# Altium PCB KNX_MCU_24CH_V1.2.PcbDoc (part 2 of 2)
Units mm, origin at the board's own origin, x right, y up, seen from the top; angles counter-clockwise.
Board outline 205.5 x 64.4 mm, 2 copper layers (F.Cu, B.Cu), stack 1.581 mm thick; 138 components, 141 nets, 447 pads, 311 vias.
Unrouted connection lines stored in the file: 65.
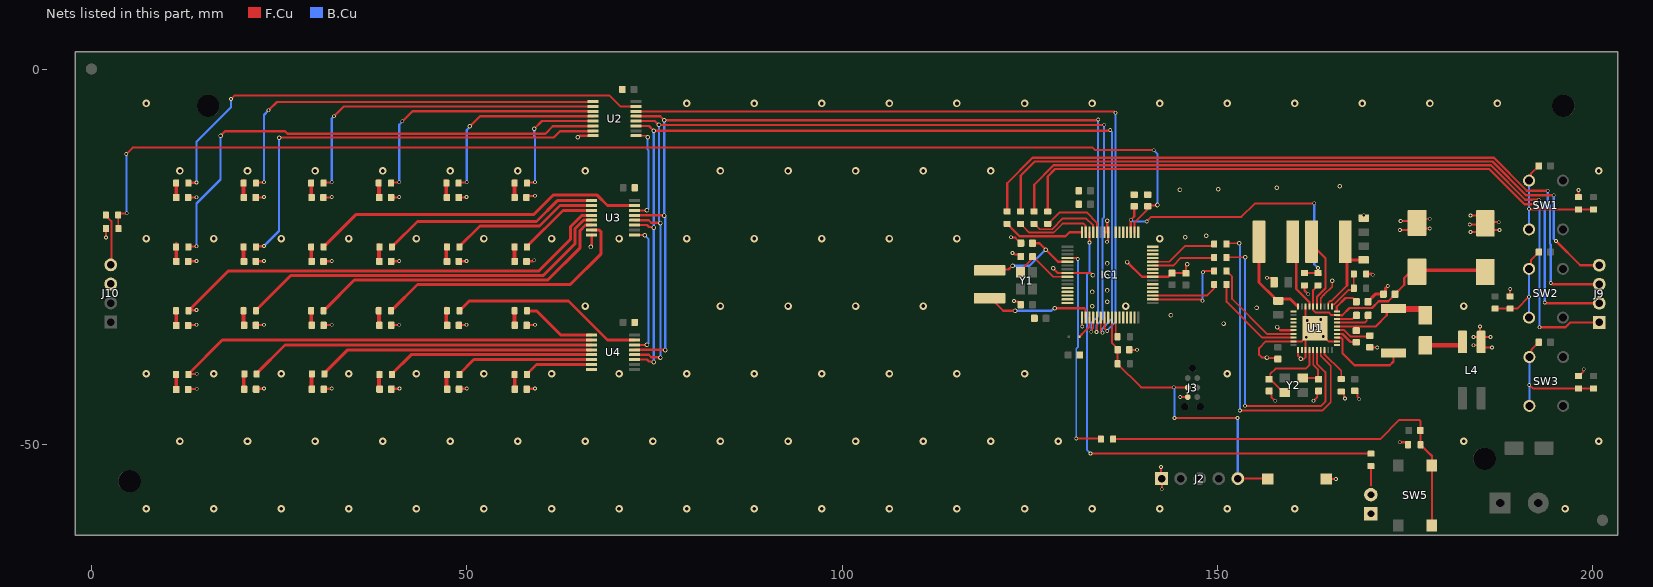
[diagram p2: the nets of this part, all layers, seen from the top]

## Via types
v1: diameter 0.5, hole 0.3, F.Cu to B.Cu, tented both sides, 144 vias
v2: diameter 1, hole 0.5, F.Cu to B.Cu, tented both sides, 98 vias
v3: diameter 0.6, hole 0.35, F.Cu to B.Cu, tented both sides, 69 vias

## Nets (pads, with @x,y where several pads share a name; then routed paths per layer and width w, separated by ;. In a path a pad name is that pad's centre, name@x,y a point inside that pad or via, vN(x,y) a via of type N, cw(c..) or ccw(c..) an arc to the next point about the centre after c; other vN are vias at no path point) (continued)
GND: C1.1 C2.1 C3.1 C4.1 C5.1 C6.1 C7.1 C8.2 C9.2 C12.1 C13.1 C14.1 C15.1 C16.1 C17.1 C18.1 C19.2 C20.2 C21.1 C22.2 C23.1 C24.1 C28.2 C30.2 C31.2 C32.2 D1.1 D4.1 D5.1 D6.1 D7.1 D8.1 D9.1 D10.1 D11.1 D12.1 D13.1 D14.1 D15.1 D16.1 D17.1 D18.1 D19.1 D20.1 D21.1 D22.1 D23.1 D24.1 D25.1 D26.1 D27.1 IC1.8 IC1.17 IC1.40 IC1.57 IC1.58 J2.1 J3.5 J10.3 L4.3 R1.2 R3.1 R6.2 R7.2 R39.2 R40.1 R42.2 R44.2 SW4.2 U1.1 U1.2 U1.14 U1.18 U1.23 U1.24 U1.25 U1.26 U1.29 U1.31 U1.33 U1.41 U2.8 U3.8 U4.8 | length 121.4
  F.Cu w0.25: v1(162.78,-44.2) 163.28,-43.7 163.28,-43.075 C19.2@163.48,-42.875
  F.Cu w0.254: J10.3@1.93,-28.206 2.354,-28.63 J10.3@2.593,-28.63 ; v1(1.93,-22.433) 1.935,-22.427 R44.2@1.935,-21.267 ; v1(122.68,-24.5) 122.747,-24.5 122.974,-24.727 123.52,-24.727 C9.2@123.793,-25 ; v1(122.88,-30.9) 122.927,-30.947 123.365,-30.947 123.47,-31.052 123.482,-31.052 123.818,-31.388 C8.2@123.818,-31.4 ; IC1.17@131.943,-33.089 131.959,-33.105 131.959,-34.284 v1(131.975,-34.3) ; v1(135.28,-23) 135.28,-22.933 135.42,-22.793 135.42,-21.775 IC1.57@135.443,-21.752 ; v1@142.468,-53 v1(142.48,-53.013) J2.1@142.48,-54.013 ; J2.1@142.58,-54.987 v1(142.58,-55.987) v1@142.593,-56 ; v1@145.038,-43.709 v1(145.051,-43.697) J3.5@146.051,-43.697 ; v1(156.58,-27.8) 156.627,-27.847 157.157,-27.847 157.48,-28.17 C15.1@157.48,-28.413 ; C17.1@158.027,-38.627 157.889,-38.488 156.654,-38.488 v3(156.592,-38.427) 156.587,-38.422 155.887,-38.422 155.537,-38.072 155.537,-37.172 156.427,-36.282 U1.29@160.101,-36.282 161.247,-36.282 U1.41@161.747,-35.782 ; U1.31@160.747,-37.427 160.747,-38.209 161.08,-38.542 v3(161.08,-38.6) ; v3@161.08,-38.672 161.437,-38.672 161.747,-38.362 U1.33@161.747,-37.427 U1.41@161.747,-35.782 ; U1.18@161.747,-31.636 161.747,-33.282 v3(161.962,-33.497) v3(162.997,-34.532) ; v3(163.747,-33.372) 163.747,-33.782 v3(162.997,-34.532) ; U1.14@163.747,-31.636 163.747,-30.533 164.18,-30.1 165.28,-29 v3(165.28,-28.2) ; SW4.2@164.768,-54.6 v1(165.767,-54.6) v1@165.78,-54.587 ; U1.2@165.893,-36.282 164.747,-36.282 v3(164.087,-35.622) v3(162.997,-34.532) ; R40.1@166.477,-42.934 166.539,-42.934 166.825,-43.22 166.825,-43.678 166.98,-43.833 v1(166.98,-43.9) ; C18.1@168.28,-42.862 168.292,-42.862 168.628,-43.198 168.628,-43.681 168.88,-43.933 v1(168.88,-44) ; C16.1@169.48,-19.863 v1(169.48,-19.475) ; v1@174.28,-21.462 v1(174.293,-21.45) 175.293,-21.45 ; v1@174.38,-20.262 v1(174.393,-20.25) C22.2@175.393,-20.25 ; C22.2@177.268,-21.25 v1(178.267,-21.25) v1@178.28,-21.237 ; C22.2@177.268,-19.95 v1(178.267,-19.95) v1@178.28,-19.937 ; v1@183.58,-20.713 v1(183.593,-20.7) C28.2@184.593,-20.7 ; v1@183.68,-21.712 v1(183.693,-21.7) C28.2@184.693,-21.7 ; v1@183.68,-19.513 v1(183.693,-19.5) C28.2@184.693,-19.5 ; v1@184.08,-36.812 v1(184.093,-36.8) L4.3@185.093,-36.8 ; v1@184.08,-35.713 v1(184.093,-35.7) L4.3@185.093,-35.7 ; v1@184.968,-34.3 v1(184.98,-34.313) L4.3@184.98,-35.312 ; L4.3@185.368,-35.7 v1(186.367,-35.7) v1@186.38,-35.687 ; L4.3@185.568,-37.1 v1(186.567,-37.1) v1@186.58,-37.087 ; C28.2@186.467,-20.4 v1(187.467,-20.4) v1@187.48,-20.387 ; C28.2@186.551,-21.451 v1(187.551,-21.451) v1@187.564,-21.438 ; v1@188.968,-29.3 v1(188.98,-29.313) R6.2@188.98,-30.312 ; v1@198.068,-16.1 v1(198.08,-16.113) R1.2@198.08,-17.113 ; R7.2@198.08,-40.913 198.142,-40.913 198.733,-40.322 198.733,-40.047 v1(198.78,-40) ; U1.41@161.747,-35.782 v3(161.822,-35.707) v3(162.997,-34.532)
  F.Cu w0.3: D16.1@12.88,-34.112 v1@13.955,-34.112 ; D9.1@12.88,-25.613 v1@13.955,-25.613 ; D1.1@12.88,-17.113 v1@13.955,-17.113 ; D22.1@12.905,-42.613 v1@13.98,-42.613 ; D17.1@21.865,-34.097 v1@22.94,-34.097 ; D10.1@21.865,-25.598 v1@22.94,-25.598 ; D4.1@21.865,-17.097 v1@22.94,-17.097 ; D23.1@21.89,-42.597 v1@22.965,-42.597 ; D18.1@30.89,-34.097 v1@31.965,-34.097 ; D12.1@30.89,-25.598 v1@31.965,-25.598 ; D5.1@30.89,-17.097 v1@31.965,-17.097 ; D24.1@30.915,-42.597 v1@31.99,-42.597 ; D19.1@39.89,-34.097 v1@40.965,-34.097 ; D13.1@39.89,-25.598 v1@40.965,-25.598 ; D6.1@39.89,-17.097 v1@40.965,-17.097 ; D25.1@39.915,-42.597 v1@40.99,-42.597 ; D20.1@48.865,-34.097 v1@49.94,-34.097 ; D14.1@48.865,-25.598 v1@49.94,-25.598 ; D7.1@48.865,-17.097 v1@49.94,-17.097 ; D26.1@48.89,-42.597 v1@49.965,-42.597 ; D21.1@57.965,-34.097 v1@59.04,-34.097 ; D15.1@57.965,-25.598 58.829,-25.598 58.946,-25.481 v1(59,-25.481) ; D8.1@57.965,-17.097 58.137,-16.926 59.04,-16.926 v1(59.078,-16.888) ; D27.1@57.99,-42.597 v1@59.065,-42.597 ; v3(64.8,-9.1) 65.012,-8.888 U2.8@66.838,-8.888 ; v3(66.5,-23.7) 66.638,-23.562 U3.8@66.638,-22.087 ; v3(128.108,-26.557) 128.728,-27.177 IC1.8@130.018,-27.177 133.128,-27.177 v3(133.408,-27.457) ; IC1.58@134.943,-21.752 IC1.57@135.443,-21.752 135.3,-21.752 v3(135.3,-20.2) ; v3(137.958,-25.707) 139.928,-27.677 IC1.40@141.368,-27.677 143.453,-27.677 143.948,-27.182 145.758,-27.182 145.788,-27.212 145.788,-26.177 v3(145.958,-26.007) ; v3(157.937,-34.372) 158.347,-34.782 U1.26@160.101,-34.782 ; R42.2@161.58,-28.825 161.58,-29.5 v1(162.08,-30) ; v1(174.28,-49.7) 175.058,-49.7 175.077,-49.718 175.152,-49.718 175.402,-49.968 R3.1@175.402,-50.043
  F.Cu w0.4: R39.2@169.805,-27.3 170.58,-27.3 v1(170.68,-27.4) ; C14.1@170.055,-31 170.055,-30.975 171.03,-30 172.105,-30 172.355,-29.75 172.355,-29.225 v1(172.68,-28.9)
  other v1: 14.018,-42.574 23.003,-42.559 32.028,-42.559 41.028,-42.559 50.003,-42.559 59.103,-42.559 13.993,-34.074 22.978,-34.059 32.003,-34.059 41.003,-34.059 49.978,-34.059 59.078,-34.059 13.993,-25.574 22.978,-25.559 32.003,-25.559 41.003,-25.559 49.978,-25.559 13.993,-17.074 22.978,-17.059 32.003,-17.059 41.003,-17.059 49.978,-17.059
  other v2: 7.293,-58.576 16.293,-58.576 25.293,-58.576 34.293,-58.576 43.293,-58.576 52.293,-58.576 61.293,-58.576 70.293,-58.576 79.293,-58.576 88.293,-58.576 97.293,-58.576 106.293,-58.576 115.293,-58.576 124.293,-58.576 133.293,-58.576 142.293,-58.576 151.293,-58.576 160.293,-58.576 196.293,-58.576 11.793,-49.576 20.793,-49.576 29.793,-49.576 38.793,-49.576 47.793,-49.576 56.793,-49.576 65.793,-49.576 74.793,-49.576 83.793,-49.576 92.793,-49.576 101.793,-49.576 110.793,-49.576 119.793,-49.576 128.793,-49.576 182.793,-49.576 200.793,-49.576 7.293,-40.576 16.293,-40.576 25.293,-40.576 34.293,-40.576 43.293,-40.576 52.293,-40.576 61.293,-40.576 70.293,-40.576 79.293,-40.576 88.293,-40.576 97.293,-40.576 106.293,-40.576 115.293,-40.576 124.293,-40.576 151.293,-40.576 65.793,-31.576 83.793,-31.576 92.793,-31.576 101.793,-31.576 110.793,-31.576 137.793,-31.576 182.793,-31.576 7.293,-22.576 16.293,-22.576 25.293,-22.576 34.293,-22.576 43.293,-22.576 52.293,-22.576 61.293,-22.576 70.293,-22.576 79.293,-22.576 88.293,-22.576 97.293,-22.576 106.293,-22.576 115.293,-22.576 142.293,-22.576 11.793,-13.576 20.793,-13.576 29.793,-13.576 38.793,-13.576 47.793,-13.576 56.793,-13.576 65.793,-13.576 83.793,-13.576 92.793,-13.576 101.793,-13.576 110.793,-13.576 119.793,-13.576 200.793,-13.576 7.293,-4.576 79.293,-4.576 88.293,-4.576 97.293,-4.576 106.293,-4.576 115.293,-4.576 124.293,-4.576 133.293,-4.576 142.293,-4.576 151.293,-4.576 160.293,-4.576 169.293,-4.576 178.293,-4.576 187.293,-4.576
  other v3: 150.8,-33.9 143.8,-32.8 155.2,-31.8 133.3,-31.6 135.3,-31 133.3,-29.7 135.3,-29.5 135.3,-27.6 135.3,-25.9 145.7,-22.4 148.5,-22.2 145,-16.1 150.1,-16 157.9,-15.8 166.3,-15.6
Led_ShiftRegDATA: IC1.23 U2.14 | length 95.4
  F.Cu w0.25: U2.14@72.563,-5.638 136.225,-5.638 v1(136.4,-5.813) ; IC1.23@134.943,-33.102 134.943,-34.509 v1(135.319,-34.885)
  B.Cu w0.25: v1(135.319,-34.885) 135.319,-34.817 135.444,-34.692 135.444,-34.664 136.4,-33.708 v1(136.4,-5.813)
NetC1_2: C1.2 IC1.5 L1.1 | length 17.4
  F.Cu w0.254: v1(122.48,-22.4) 122.527,-22.447 123.077,-22.447 123.805,-23.175 123.805,-23.213
  F.Cu w0.3: L1.1@118.288,-26.717 122.146,-26.717 122.653,-26.21 v3(122.7,-26.21) ; C1.2@125.355,-23.2 126.28,-23.2 v3(127.13,-24.05) ; v3@127.06,-23.98 128.757,-25.677 IC1.5@130.018,-25.677
  B.Cu w0.3: v3(122.7,-26.21) 124.97,-26.21 v3(127.13,-24.05)
NetC10_1: C10.1 U1.4 | length 3.1
  F.Cu w0.3: U1.4@165.893,-35.282 166.662,-35.282 167.731,-36.351 168.431,-36.351 C10.1@168.48,-36.4
NetC10_2: C10.2 D3.1 R34.1 U1.6 | length 14.1
  F.Cu w0.3: U1.6@165.893,-34.282 171.064,-34.282 172.55,-32.796 172.55,-32.372 173.013,-31.909 R34.1@173.437,-31.909
  F.Cu w0.4: 168.479,-34.307 168.48,-34.308 C10.2@168.48,-34.825
  F.Cu w0.8: R34.1@173.437,-31.909 173.499,-31.972 177.337,-31.972 177.923,-32.557 D3.1@177.937,-32.572
NetC11_1: C11.1 U1.8 | length 2.8
  F.Cu w0.3: U1.8@165.893,-33.282 167.998,-33.282 168.155,-33.125 168.205,-33.125 168.48,-32.85 C11.1@168.48,-32.8
NetC11_2: C11.2 U1.7 | length 5.4
  F.Cu w0.25: U1.7@165.893,-33.782 169.598,-33.782 169.876,-33.504 169.876,-32.979 C11.2@170.055,-32.8 ; C11.2@170.055,-32.775 170.38,-32.45 C11.2@170.405,-32.45
NetC12_2: C12.2 U1.5 | length 5.7
  F.Cu w0.25: U1.5@165.893,-34.782 166.862,-34.782 167.705,-35.625 C12.2@170.255,-35.625
  F.Cu w0.254: 170.268,-37.1 v1(171.267,-37.1) v1@171.28,-37.087
NetC14_2: C14.2 U1.10 | length 3.9
  F.Cu w0.3: U1.10@165.893,-32.282 165.893,-31.662 167.055,-30.5 168.005,-30.5 168.18,-30.675 168.205,-30.675 168.505,-30.975 C14.2@168.505,-31
NetC25_1: C25.1 R3.2 R99.1 SW5.1 | length 57.5
  F.Cu w0.25: R99.1@136.105,-49.3 171.68,-49.3 174.233,-46.747 176.88,-46.747 177.027,-46.893 177.027,-48.143 177.052,-48.168 R3.2@177.052,-50.043 ; R3.2@177.377,-50.368 177.973,-50.965
  F.Cu w0.3: R3.2@177.052,-50.043 177.052,-50.118 177.302,-50.368 177.377,-50.368 177.973,-50.965 178.57,-51.562 SW5.1@178.57,-52.8 SW5.1@178.57,-60.8
NetC26_2: C26.2 R1.1 R2.2 SW1.3 SW1.4 | length 17.7
  F.Cu w0.254: v1(191.48,-18.6) 191.605,-18.725 R1.1@198.08,-18.725 R2.2@200.08,-18.725 ; SW1.4@191.498,-14.867 191.756,-14.609 191.756,-13.974 192.805,-12.925 C26.2@192.805,-12.9
  B.Cu w0.254: SW1.3@191.498,-21.367 191.489,-21.358 191.489,-18.609 v1(191.48,-18.6) 191.489,-18.591 191.489,-14.876 SW1.4@191.498,-14.867
NetC27_2: C27.2 R4.2 R6.1 SW2.3 SW2.4 | length 14.4
  F.Cu w0.254: R4.2@186.98,-31.925 R6.1@188.98,-31.925 189.905,-31.925 v1(191.489,-30.341) ; SW2.4@191.498,-26.617 191.756,-26.359 191.756,-25.474 192.805,-24.425 C27.2@192.805,-24.4
  B.Cu w0.254: SW2.3@191.498,-33.099 191.498,-30.35 v1(191.489,-30.341) 191.498,-30.332 SW2.4@191.498,-26.617
NetC29_2: C29.2 R5.2 R7.1 SW3.3 SW3.4 | length 17.7
  F.Cu w0.254: v1(191.539,-42.091) 191.998,-42.55 R7.1@198.08,-42.55 R5.2@200.08,-42.55 ; SW3.4@191.548,-38.367 191.806,-38.109 191.806,-37.424 192.805,-36.425 C29.2@192.805,-36.4
  B.Cu w0.254: SW3.3@191.548,-44.849 191.548,-42.1 v1(191.539,-42.091) 191.548,-42.082 SW3.4@191.548,-38.367
NetD1_2: D1.2 R8.2 | length 1.9
  F.Cu w0.5: R8.2@11.275,-15.2 11.29,-15.215 11.29,-17.097 D1.2@11.305,-17.113
NetD3_2: D3.2 L4.4 | length 5.2
  F.Cu w0.6: D3.2@177.68,-36.8 182.33,-36.8 182.63,-36.5 L4.4@182.63,-36.35
NetD4_2: D4.2 R9.2 | length 2
  F.Cu w0.3: R9.2@20.275,-14.8 R9.2@20.294,-14.819
  F.Cu w0.5: R9.2@20.26,-15.185 R9.2@20.275,-15.2 20.275,-17.082 D4.2@20.29,-17.097
NetD5_2: D5.2 R10.2 | length 1.9
  F.Cu w0.5: R10.2@29.285,-15.185 29.3,-15.2 29.3,-17.082 D5.2@29.315,-17.097
NetD6_2: D6.2 R11.2 | length 2
  F.Cu w0.3: R11.2@38.275,-14.8 R11.2@38.294,-14.819
  F.Cu w0.5: R11.2@38.285,-15.185 38.3,-15.2 38.3,-17.082 D6.2@38.315,-17.097
NetD7_2: D7.2 R12.2 | length 2
  F.Cu w0.3: R12.2@47.275,-14.8 R12.2@47.294,-14.819
  F.Cu w0.5: R12.2@47.26,-15.185 R12.2@47.275,-15.2 47.275,-17.082 D7.2@47.29,-17.097
NetD8_2: D8.2 R13.2 | length 2
  F.Cu w0.3: R13.2@56.375,-14.8 R13.2@56.394,-14.819
  F.Cu w0.5: R13.2@56.36,-15.185 R13.2@56.375,-15.2 56.375,-17.082 D8.2@56.39,-17.097
NetD9_2: D9.2 R14.2 | length 2.4
  F.Cu w0.3: 11.275,-23.2 11.294,-23.219 R14.2@11.294,-23.7
  F.Cu w0.5: R14.2@11.275,-23.7 11.29,-23.715 11.29,-25.598 D9.2@11.305,-25.613
NetD10_2: D10.2 R15.2 | length 2
  F.Cu w0.254: R15.2@20.275,-23.3 R15.2@20.294,-23.319
  F.Cu w0.3: R15.2@20.275,-23.3 R15.2@20.294,-23.319
  F.Cu w0.5: R15.2@20.26,-23.685 R15.2@20.275,-23.7 20.275,-25.582 D10.2@20.29,-25.598
NetD11_2: D11.2 R26.2 | length 2.6
  F.Cu w0.25: 170.43,-55.5 R26.2@170.43,-52.895
NetD12_2: D12.2 R16.2 | length 1.9
  F.Cu w0.5: R16.2@29.285,-23.685 29.3,-23.7 29.3,-25.582 D12.2@29.315,-25.598
NetD13_2: D13.2 R17.2 | length 2
  F.Cu w0.3: R17.2@38.275,-23.3 R17.2@38.294,-23.319
  F.Cu w0.5: R17.2@38.285,-23.685 38.3,-23.7 38.3,-25.582 D13.2@38.315,-25.598
NetD14_2: D14.2 R18.2 | length 2
  F.Cu w0.3: R18.2@47.275,-23.3 R18.2@47.294,-23.319
  F.Cu w0.5: R18.2@47.26,-23.685 47.275,-23.7 47.275,-25.582 D14.2@47.29,-25.598
NetD15_2: D15.2 R19.2 | length 2
  F.Cu w0.3: R19.2@56.375,-23.3 R19.2@56.394,-23.319
  F.Cu w0.5: R19.2@56.36,-23.685 R19.2@56.375,-23.7 56.375,-25.582 D15.2@56.39,-25.598
NetD16_2: D16.2 R20.2 | length 1.9
  F.Cu w0.5: R20.2@11.275,-32.2 11.29,-32.215 11.29,-34.097 D16.2@11.305,-34.112
NetD17_2: D17.2 R21.2 | length 2
  F.Cu w0.3: R21.2@20.275,-31.8 R21.2@20.294,-31.819
  F.Cu w0.5: R21.2@20.26,-32.185 R21.2@20.275,-32.2 20.275,-34.082 D17.2@20.29,-34.097
NetD18_2: D18.2 R22.2 | length 1.9
  F.Cu w0.5: R22.2@29.285,-32.185 29.3,-32.2 29.3,-34.082 D18.2@29.315,-34.097
NetD19_2: D19.2 R23.2 | length 2
  F.Cu w0.3: R23.2@38.275,-31.8 R23.2@38.294,-31.819
  F.Cu w0.5: R23.2@38.285,-32.185 38.3,-32.2 38.3,-34.082 D19.2@38.315,-34.097
NetD20_2: D20.2 R24.2 | length 2
  F.Cu w0.3: R24.2@47.275,-31.8 R24.2@47.294,-31.819
  F.Cu w0.5: R24.2@47.26,-32.185 47.275,-32.2 47.275,-34.082 D20.2@47.29,-34.097
NetD21_2: D21.2 R25.2 | length 2
  F.Cu w0.3: R25.2@56.375,-31.8 R25.2@56.394,-31.819
  F.Cu w0.5: R25.2@56.36,-32.185 R25.2@56.375,-32.2 56.375,-34.082 D21.2@56.39,-34.097
NetD22_2: D22.2 R27.2 | length 1.9
  F.Cu w0.5: R27.2@11.3,-40.7 11.315,-40.715 11.315,-42.597 D22.2@11.33,-42.613
NetD23_2: D23.2 R28.2 | length 2
  F.Cu w0.3: R28.2@20.3,-40.3 R28.2@20.319,-40.319
  F.Cu w0.5: R28.2@20.285,-40.685 20.3,-40.7 20.3,-42.582 D23.2@20.315,-42.597
NetD24_2: D24.2 R29.2 | length 1.9
  F.Cu w0.5: R29.2@29.31,-40.685 29.325,-40.7 29.325,-42.582 D24.2@29.34,-42.597
NetD25_2: D25.2 R30.2 | length 2
  F.Cu w0.3: R30.2@38.3,-40.3 R30.2@38.319,-40.319
  F.Cu w0.5: R30.2@38.31,-40.685 38.325,-40.7 38.325,-42.582 D25.2@38.34,-42.597
NetD26_2: D26.2 R31.2 | length 2
  F.Cu w0.3: R31.2@47.3,-40.3 R31.2@47.319,-40.319
  F.Cu w0.5: R31.2@47.285,-40.685 47.3,-40.7 47.3,-42.582 D26.2@47.315,-42.597
NetD27_2: D27.2 R37.2 | length 2
  F.Cu w0.3: R37.2@56.4,-40.3 R37.2@56.419,-40.319
  F.Cu w0.5: R37.2@56.385,-40.685 56.4,-40.7 56.4,-42.582 D27.2@56.415,-42.597
NetJ9_1: J9.1 R91.2 | length 96.8
  F.Cu w0.3: R91.2@127.38,-18.975 127.38,-14.307 128.362,-13.325 186.209,-13.325 190.884,-18 v1(192.28,-18) ; v1(192.88,-34.4) 196.342,-34.4 196.992,-33.75 J9.1@200.86,-33.75
  B.Cu w0.3: v1(192.28,-18) 192.28,-18.002 192.88,-18.602 v1(192.88,-34.4)
NetJ9_2: J9.2 R92.2 | length 95.1
  F.Cu w0.3: R92.2@125.58,-18.975 125.58,-15.4 128.155,-12.825 186.416,-12.825 190.991,-17.4 v1(192.78,-17.4) ; v1(193.58,-31.1) 193.634,-31.1 193.744,-31.21 J9.2@200.86,-31.21
  B.Cu w0.3: v1(192.78,-17.4) 193.58,-18.2 v1(193.58,-31.1)
NetJ9_3: J9.3 R93.2 | length 98
  F.Cu w0.3: R93.2@121.98,-18.975 121.98,-15.2 125.355,-11.825 186.83,-11.825 191.205,-16.2 v1(193.98,-16.2) ; v1(194.38,-28.5) 194.434,-28.5 194.604,-28.67 J9.3@200.86,-28.67
  B.Cu w0.3: v1(193.98,-16.2) 193.98,-17.893 194.28,-18.193 194.28,-23.269 194.38,-23.369 v1(194.38,-28.5)
NetJ9_4: J9.4 R94.2 | length 91.7
  F.Cu w0.3: R94.2@123.78,-18.975 123.78,-14.2 124.105,-13.875 125.655,-12.325 186.623,-12.325 191.098,-16.8 v1(194.78,-16.8) ; v1(195.08,-22.9) 198.31,-26.13 J9.4@200.86,-26.13
  B.Cu w0.3: v1(194.78,-16.8) 194.78,-22.6 v1(195.08,-22.9)
NetJP1_2: IC1.19 JP1.2 | length 3.1
  F.Cu w0.3: JP1.2@131.633,-35.657 131.928,-35.362 131.928,-35.337 132.943,-34.322 IC1.19@132.943,-33.102
NetL1_2: IC1.18 L1.2 | length 16.2
  F.Cu w0.3: L1.2@118.288,-30.417 119.688,-30.417 121.467,-32.196 v3(123.034,-32.196) ; v3(128.308,-31.857) 132.258,-31.857 132.443,-32.042 IC1.18@132.443,-33.102
  B.Cu w0.3: v3(123.034,-32.196) 127.889,-32.196 128.227,-31.857 v3(128.308,-31.857)
NetL2_1: L2.1 U1.17 | length 9.5
  F.Cu w0.3: L2.1@160.03,-23.1 160.48,-23.55 160.48,-29.3 162.247,-31.067 U1.17@162.247,-31.636
NetL2_2: L2.2 R35.1 U1.20 | length 12.1
  F.Cu w0.4: L2.2@155.53,-23.1 155.53,-28.425 157.58,-30.475 157.58,-30.575 157.694,-30.689 157.882,-30.689 R35.1@158.08,-30.887 ; R35.1@157.926,-30.645 159.705,-30.645 160.595,-31.534 ; 160.595,-31.534 U1.20@160.697,-31.636
NetL3_1: L3.1 U1.15 | length 9.6
  F.Cu w0.3: L3.1@162.48,-23.3 164.38,-25.2 164.38,-29.21 163.247,-30.343 U1.15@163.247,-31.636
NetL3_2: L3.2 R36.1 U1.12 | length 12.3
  F.Cu w0.25: U1.12@164.747,-31.636 164.749,-31.634 164.749,-31.257 164.793,-31.213 164.793,-31.097 164.985,-30.905 165.175,-30.905 167.27,-28.81
  F.Cu w0.4: L3.2@167.03,-23 167.03,-24.762 L3.2@167.27,-25.002 ; 167.27,-28.81 L3.2@167.27,-25.002 ; R36.1@169.48,-25.412 167.68,-25.412 L3.2@167.27,-25.002
NetR8_1: R8.1 U2.15 | length 68.9
  F.Cu w0.254: v1(18.6,-4) 19.1,-3.5 68.988,-3.5 70.475,-4.988 U2.15@72.563,-4.988
  F.Cu w0.3: R8.1@12.925,-15.2 12.987,-15.138 13.962,-15.138 v1(14,-15.1)
  B.Cu w0.3: v1(14,-15.1) 14,-9.7 18.6,-5.1 v1(18.6,-4)
NetR9_1: R9.1 U2.1 | length 54.7
  F.Cu w0.3: R9.1@21.91,-15.185 21.972,-15.123 22.947,-15.123 v1(22.985,-15.085) ; v1(23.6,-5.5) 24.712,-4.388 66.788,-4.388 U2.1@66.838,-4.338
  B.Cu w0.3: v1(22.985,-15.085) 22.985,-6.115 v1(23.6,-5.5)
NetR10_1: R10.1 U2.2 | length 45.1
  F.Cu w0.3: R10.1@30.935,-15.185 30.997,-15.123 31.972,-15.123 v1(32.01,-15.085) ; v1(32.3,-6.3) 33.613,-4.988 U2.2@66.838,-4.988
  B.Cu w0.3: v1(32.01,-15.085) 32.01,-6.59 v1(32.3,-6.3)
NetR11_1: R11.1 U2.3 | length 35.4
  F.Cu w0.3: R11.1@39.935,-15.185 39.997,-15.123 40.972,-15.123 v1(41.01,-15.085) ; v1(41.4,-6.963) 41.454,-6.963 42.779,-5.638 U2.3@66.838,-5.638
  B.Cu w0.3: v1(41.01,-15.085) 41.01,-7.407 41.4,-7.017 v1(41.4,-6.963)
NetR12_1: R12.1 U2.4 | length 25.7
  F.Cu w0.3: R12.1@48.91,-15.185 48.972,-15.123 49.947,-15.123 v1(49.985,-15.085) ; v3(50.4,-7.612) 50.426,-7.612 51.751,-6.288 U2.4@66.838,-6.288
  B.Cu w0.3: v1(49.985,-15.085) 49.985,-8.109 50.4,-7.694 v3(50.4,-7.612)
NetR13_1: R13.1 U2.5 | length 16.5
  F.Cu w0.3: R13.1@58.01,-15.185 58.072,-15.123 59.047,-15.123 v1(59.085,-15.085) ; v3(59,-7.963) 60.025,-6.938 U2.5@66.838,-6.938
  B.Cu w0.3: v3(59,-7.963) 59,-8.965 59.085,-9.05 v1(59.085,-15.085)
NetR14_1: R14.1 U2.6 | length 67.6
  F.Cu w0.3: R14.1@12.925,-23.7 12.987,-23.638 13.962,-23.638 v1(14,-23.6) ; v3(17.2,-8.9) 17.8,-8.3 25.8,-8.3 26.113,-8.613 60.487,-8.613 61.462,-7.638 66.788,-7.638 U2.6@66.838,-7.588
  B.Cu w0.3: v1(14,-23.6) 14,-17.916 17.2,-14.716 v3(17.2,-8.9)
NetR15_1: R15.1 U2.7 | length 58.6
  F.Cu w0.3: R15.1@21.91,-23.685 21.972,-23.623 22.947,-23.623 v1(22.985,-23.585) ; v3(25,-9.15) 25.037,-9.113 61.587,-9.113 62.412,-8.288 66.788,-8.288 U2.7@66.838,-8.238
  B.Cu w0.3: v1(22.985,-23.585) 25,-21.57 v3(25,-9.15)
NetR16_1: R16.1 U3.15 | length 45
  F.Cu w0.3: R16.1@30.935,-23.685 R16.1@30.997,-23.623
  F.Cu w0.4: R16.1@30.925,-23.7 30.925,-23.625 31.125,-23.425 31.2,-23.425 35.225,-19.4 58.9,-19.4 61.5,-16.8 67.374,-16.8 68.761,-18.187 U3.15@72.363,-18.187
NetR17_1: R17.1 U3.1 | length 29.2
  F.Cu w0.4: R17.1@40.025,-23.7 40.025,-23.625 40.225,-23.425 40.3,-23.425 43.425,-20.3 59.3,-20.3 62.062,-17.538 U3.1@66.638,-17.538
NetR18_1: R18.1 U3.2 | length 19.9
  F.Cu w0.4: R18.1@49.025,-23.7 49.025,-23.625 49.027,-23.623 51.75,-20.9 59.7,-20.9 62.413,-18.187 U3.2@66.638,-18.187
NetR19_1: R19.1 U3.3 | length 10.6
  F.Cu w0.4: R19.1@58.072,-23.623 58.072,-23.578 62.813,-18.838 U3.3@66.638,-18.838
NetR20_1: R20.1 U3.4 | length 61.1
  F.Cu w0.3: R20.1@12.925,-32.2 12.987,-32.138 13.962,-32.138 v1(14,-32.1)
  F.Cu w0.4: R20.1@12.925,-32.2 12.925,-32.125 13.125,-31.925 13.2,-31.925 18.225,-26.9 59.6,-26.9 63.8,-22.7 63.8,-21.051 65.364,-19.487 U3.4@66.638,-19.487
NetR21_1: R21.1 U3.5 | length 51
  F.Cu w0.3: R21.1@21.91,-32.185 21.925,-32.17 R21.1@21.972,-32.123
  F.Cu w0.4: R21.1@21.925,-32.2 21.925,-32.17 21.925,-32.125 26.55,-27.5 60.2,-27.5 64.4,-23.3 64.4,-21.3 65.563,-20.138 U3.5@66.638,-20.138
NetR22_1: R22.1 U3.6 | length 41.9
  F.Cu w0.3: R22.1@30.935,-32.185 R22.1@30.997,-32.123
  F.Cu w0.4: R22.1@30.925,-32.2 30.925,-32.125 31.125,-31.925 31.2,-31.925 35.025,-28.1 60.8,-28.1 65.1,-23.8 65.1,-21.5 65.813,-20.787 U3.6@66.638,-20.787
NetR23_1: R23.1 U3.7 | length 35.5
  F.Cu w0.3: R23.1@39.935,-32.185 R23.1@39.997,-32.123
  F.Cu w0.4: R23.1@39.925,-32.2 39.925,-32.125 40.125,-31.925 40.2,-31.925 43.425,-28.7 63.8,-28.7 67.9,-24.6 67.9,-21.7 67.637,-21.438 U3.7@66.638,-21.438
NetR24_1: R24.1 U4.15 | length 26.1
  F.Cu w0.4: R24.1@49.025,-32.2 49.025,-32.125 49.225,-31.925 49.3,-31.925 50.325,-30.9 63.556,-30.9 68.761,-36.105 U4.15@72.363,-36.105
NetR25_1: R25.1 U4.1 | length 10
  F.Cu w0.4: R25.1@58.025,-32.2 59.3,-32.2 62.555,-35.455 U4.1@66.638,-35.455
NetR27_1: R27.1 U4.2 | length 56.8
  F.Cu w0.3: R27.1@12.95,-40.7 13.012,-40.638 13.987,-40.638 v1(14.025,-40.6)
  F.Cu w0.4: R27.1@12.925,-40.7 12.925,-40.625 17.445,-36.105 U4.2@66.638,-36.105
NetR28_1: R28.1 U4.3 | length 46.2
  F.Cu w0.4: R28.1@22.025,-40.6 22.025,-40.525 25.795,-36.755 U4.3@66.638,-36.755
NetR29_1: R29.1 U4.4 | length 37
  F.Cu w0.4: R29.1@31.025,-40.6 31.025,-40.525 34.145,-37.405 U4.4@66.638,-37.405
NetR30_1: R30.1 U4.5 | length 27.8
  F.Cu w0.4: R30.1@40.025,-40.7 40.025,-40.625 42.595,-38.055 U4.5@66.638,-38.055
NetR31_1: R31.1 U4.6 | length 18.5
  F.Cu w0.4: R31.1@49.025,-40.7 49.025,-40.625 50.945,-38.705 U4.6@66.638,-38.705
NetR34_2: R34.2 U1.3 | length 11.7
  F.Cu w0.3: U1.3@165.893,-35.782 166.246,-35.782 166.269,-35.805 166.444,-35.805 166.649,-36.01 166.649,-37.869 168.252,-39.472 172.937,-39.472 173.437,-38.972 R34.2@173.437,-37.614
NetR37_1: R37.1 U4.7 | length 9.3
  F.Cu w0.3: R37.1@58.035,-40.685 R37.1@58.097,-40.623
  F.Cu w0.4: R37.1@58.025,-40.7 58.025,-40.625 59.295,-39.355 U4.7@66.638,-39.355
NetR38_2: R38.2 R39.1 U1.11 | length 6
  F.Cu w0.25: U1.11@165.247,-31.636 165.247,-31.357 165.249,-31.355 165.528,-31.355 167.433,-29.45 167.905,-29.45 R38.2@168.155,-29.2 R39.1@168.155,-27.3
NetR40_2: R40.2 U1.38 | length 4.8
  F.Cu w0.25: U1.38@164.247,-37.427 164.247,-37.982 166.477,-40.212 R40.2@166.477,-41.297
NetU2_9: U2.9 U3.14 | length 13.1
  F.Cu w0.254: U3.14@72.363,-18.838 72.375,-18.825 73.988,-18.825 v3(74,-18.812) ; U2.9@72.563,-8.888 73.875,-8.888 v3(74.1,-9.113)
  B.Cu w0.254: v3(74,-18.812) 74.227,-18.586 74.227,-10.853 74.1,-10.726 v3(74.1,-9.113)
NetU3_9: U3.9 U4.14 | length 17.9
  F.Cu w0.254: U4.14@72.363,-36.755 72.375,-36.743 73.988,-36.743 v3(74,-36.73) ; U3.9@72.363,-22.087 72.379,-22.104 73.674,-22.104 v3(73.69,-22.12)
  B.Cu w0.254: v3(73.69,-22.12) 74.227,-22.657 74.227,-36.503 v3(74,-36.73)
P000: IC1.64 R93.1 | length 10.9
  F.Cu w0.3: R93.1@121.98,-20.625 122.055,-20.625 122.305,-20.875 122.305,-20.95 123.63,-22.275 129.759,-22.275 130.282,-21.752 IC1.64@131.943,-21.752
P001: IC1.63 R94.1 | length 10.7
  F.Cu w0.25: R94.1@123.78,-20.625 123.855,-20.625 124.13,-20.9 124.13,-20.975 124.955,-21.8 128.153,-21.8 129.353,-20.6 132.154,-20.6 132.418,-20.864 132.418,-21.727 IC1.63@132.443,-21.752
P003: IC1.61 R92.1 | length 10.1
  F.Cu w0.25: R92.1@125.58,-20.625 125.655,-20.625 125.93,-20.9 125.93,-20.975 126.305,-21.35 127.966,-21.35 129.416,-19.9 132.48,-19.9 133.418,-20.838 133.418,-21.727 IC1.61@133.443,-21.752
P004: IC1.60 R91.1 | length 9
  F.Cu w0.25: R91.1@127.38,-20.625 127.455,-20.625 128.98,-19.1 132.58,-19.1 133.943,-20.463 IC1.60@133.943,-21.752
P012: IC1.55
P013: IC1.54
P014: IC1.53
P015: IC1.52
P100: IC1.48
P101: IC1.47
P102: IC1.46
P103: IC1.45
P104: IC1.44 R96.2 | length 9
  F.Cu w0.25: IC1.44@141.368,-25.677 143.588,-25.677 145.708,-23.557 R96.2@149.508,-23.557
P105: IC1.43 R95.2 | length 8.6
  F.Cu w0.25: IC1.43@141.368,-26.177 144.088,-26.177 145.108,-25.157 R95.2@149.508,-25.157
P106: IC1.42
P107: IC1.41
P109: IC1.34 R97.2 | length 12.3
  F.Cu w0.25: IC1.34@141.368,-30.677 147.828,-30.677 v1(148.008,-30.857) ; v1(148.055,-27.07) 148.225,-26.9 R97.2@149.555,-26.9
  B.Cu w0.25: v1(148.008,-30.857) 148.008,-26.957 v1@148.108,-26.957
P110: IC1.35 R98.2 | length 9.3
  F.Cu w0.25: IC1.35@141.368,-30.177 148.588,-30.177 149.508,-29.257 R98.2@149.508,-28.457
P111: IC1.36
P112: IC1.37
P113: IC1.38
P200: IC1.27
P201/MD: IC1.26 R33.1 | length 2.7
  F.Cu w0.25: IC1.26@136.443,-33.102 136.443,-35.417 R33.1@136.683,-35.657
P204: IC1.24
P301: IC1.31
P302: IC1.30
P303: IC1.29
P304: IC1.28
P407: IC1.16
P408: IC1.15
P409: IC1.14
P411: IC1.12
P413: IC1.13
P500: IC1.49
Relay_ADC: C24.2 IC1.50 R43.2 R44.1 | length 161.4
  F.Cu w0.254: R44.1@3.591,-21.249 3.581,-21.239 3.581,-19.449 R43.2@3.571,-19.439 3.757,-19.253 4.647,-19.253 v1(4.694,-19.206) ; v1(4.63,-11.332) 5.486,-10.477 133.373,-10.477 133.709,-10.813 v1(141.5,-10.813) ; IC1.50@138.943,-21.752 138.943,-20.45 140.7,-18.693 140.7,-18.287 140.809,-18.179 141.934,-18.179 v3(142,-18.113)
  B.Cu w0.254: v1(4.63,-11.332) 4.662,-11.365 4.662,-19.174 v1(4.694,-19.206) ; v1(141.5,-10.813) 142,-11.312 v3(142,-18.113)
RELAY_CAP_ADC: J10.4 R43.1 | length 7
  F.Cu w0.254: R43.1@1.921,-19.439 1.921,-19.514 2.668,-20.261 2.668,-26.002 J10.4@2.58,-26.09
RES: C21.2 IC1.25 J2.5 J3.3 R32.1 SW4.1 | length 42.8
  F.Cu w0.254: IC1.25@135.943,-33.102 135.943,-36.467 136.733,-37.257 136.673,-37.317 136.673,-38.917 R32.1@136.673,-39.257 139.817,-42.4 v1(144.18,-42.4) ; 138.268,-37.4 v1(139.267,-37.4) v1@139.28,-37.387 ; v1@144.18,-42.427 J3.3@146.038,-42.427
  F.Cu w0.3: v1(144.28,-46.5) v1(152.68,-46.5) ; J2.5@152.708,-54.557 156.637,-54.557 SW4.1@156.68,-54.6
  B.Cu w0.3: v1(144.18,-42.4) 144.18,-42.454 144.28,-42.554 v1(144.28,-46.5) ; v1(152.68,-46.5) 152.708,-46.528 J2.5@152.708,-54.557
RESETb: R96.1 U1.37 | length 43.7
  F.Cu w0.25: R96.1@151.205,-23.3 151.292,-23.213 v3(152.905,-23.213) ; v1(152.98,-45.5) 163.98,-45.5 165.08,-44.4 165.08,-39.501 163.747,-38.168 U1.37@163.747,-37.427
  B.Cu w0.25: v1(152.98,-45.5) 152.98,-39.472 152.98,-23.596
SAVEb: R95.1 U1.36 | length 40.5
  F.Cu w0.25: R95.1@151.205,-25.1 151.232,-25.073 v3(153.697,-25.073) ; v1@153.65,-44.9 163.78,-44.9 164.38,-44.3 164.38,-40.364 163.247,-39.231 U1.36@163.247,-37.427
  B.Cu w0.25: v1(153.65,-44.855) v3@153.65,-25.13
SDI/RXD: R97.1 U1.27 | length 14.2
  F.Cu w0.25: R97.1@151.205,-26.9 151.205,-26.975 151.48,-27.25 151.555,-27.25 151.93,-27.625 151.93,-30.632 156.58,-35.282 U1.27@160.101,-35.282
SDO/TXD: R98.1 U1.28 | length 13.2
  F.Cu w0.25: R98.1@151.205,-28.7 151.205,-31.025 155.962,-35.782 U1.28@160.101,-35.782
ShiftReg_Latch: IC1.21 U2.12 U3.12 U4.12 | length 130.8
  F.Cu w0.254: v1(133.878,-35.019) 133.92,-34.976 133.92,-33.125 IC1.21@133.943,-33.102
  F.Cu w0.3: U4.12@72.363,-38.055 74.251,-38.055 74.576,-38.38 75.75,-38.38 v3(75.8,-38.43) ; U3.12@72.363,-20.138 74.251,-20.138 74.576,-20.463 75.75,-20.463 v3(75.8,-20.513) ; U2.12@72.563,-6.938 75.044,-6.938 v3@75.569,-7.462 ; v3(75.6,-7.412) 75.65,-7.462 134.796,-7.462 134.846,-7.412 v1(134.9,-7.412)
  B.Cu w0.254: v1(133.878,-35.019) 133.878,-34.122 134.673,-33.327 134.673,-19.94 134.9,-19.713 v1(134.9,-7.412)
  B.Cu w0.3: v3(75.6,-7.412) 75.6,-20.231 75.8,-20.431 v3(75.8,-20.513) v3(75.8,-38.43)
ShiftReg_{\O\E\}\: IC1.20 U2.13 U3.13 U4.13 | length 131.2
  F.Cu w0.25: v1(133.178,-35) 133.226,-34.952 133.226,-34.711 133.443,-34.494 IC1.20@133.443,-33.102
  F.Cu w0.3: U4.13@72.363,-37.405 76.425,-37.405 v3(76.45,-37.43) ; U3.13@72.363,-19.487 76.275,-19.487 v3(76.3,-19.513) ; U2.13@72.563,-6.288 75.764,-6.288 v3@76.289,-6.813 ; v3(76.3,-6.813) 133.946,-6.813 134.046,-6.713 v1(134.1,-6.713)
  B.Cu w0.25: v1(133.178,-35) 133.18,-34.998 133.18,-33.82 134.1,-32.9 v1(134.1,-6.713)
  B.Cu w0.3: v3(76.3,-6.813) v3(76.3,-19.513) 76.3,-19.594 76.45,-19.744 v3(76.45,-37.43)
ShiftRegCLK: IC1.22 U2.11 U3.11 U4.11 | length 129.4
  F.Cu w0.25: IC1.22@134.443,-33.102 134.443,-34.866 134.666,-35.089 v1(134.666,-35.137)
  F.Cu w0.3: U4.11@72.363,-38.705 74,-38.705 74.268,-38.973 74.843,-38.973 v3(74.9,-39.03) ; U3.11@72.363,-20.787 74,-20.787 74.268,-21.055 74.843,-21.055 v3(74.9,-21.113) ; U2.11@72.563,-7.588 74.275,-7.588 v3(74.9,-8.213) 135.546,-8.213 135.646,-8.113 v1(135.7,-8.113)
  B.Cu w0.25: v1(134.666,-35.137) 134.619,-35.089 134.619,-34.575 135.93,-33.264 135.93,-8.384 135.7,-8.154 v1(135.7,-8.113)
  B.Cu w0.3: v3(74.9,-39.03) v3(74.9,-21.113) v3(74.9,-8.213)
"uC CLK": U1.32
User_BTN: IC1.4 R99.2 | length 28.6
  F.Cu w0.25: IC1.4@130.018,-25.177 131.209,-25.177 131.332,-25.3 v1(131.4,-25.3) ; v1(131.18,-49.2) R99.2@134.355,-49.2
  B.Cu w0.25: v1(131.18,-49.2) 131.18,-37.267 131.4,-37.047 v1(131.4,-25.3)
User_LED: IC1.62 R26.1 | length 67.2
  F.Cu w0.254: IC1.62@132.943,-21.752 132.953,-21.761 132.953,-23.093 v1(132.962,-23.102) ; v1(133.08,-51.2) 133.103,-51.222 170.408,-51.222 R26.1@170.43,-51.245
  B.Cu w0.254: v1(132.962,-23.102) 132.962,-27.017 132.601,-27.377 132.601,-50.721 v1(133.08,-51.2)
VFILT: C13.2 C22.1 C28.1 R41.1 U1.9 U1.16 | length 29.3
  F.Cu w0.254: R41.1@163.38,-28.825 163.305,-28.825 163.032,-29.098 163.032,-29.173 162.747,-29.458 U1.16@162.747,-31.636 162.747,-32.132 163.031,-32.416 164.796,-32.416 165.162,-32.782 U1.9@165.893,-32.782
  F.Cu w0.3: U1.9@165.893,-32.782 166.617,-32.782 167.574,-31.825 170.584,-31.825 171.463,-30.947 172.733,-30.947 173.655,-30.025 173.655,-30 173.655,-29.975 174.88,-28.75 174.88,-27.85 C22.1@175.98,-26.75
  F.Cu w0.5: C22.1@175.88,-26.9 C22.1@175.93,-26.95 ; C22.1@176.03,-26.8 185.03,-26.8 C28.1@185.08,-26.85
VFILT_ADC: C23.2 IC1.51 R41.2 R42.1 | length 41.1
  F.Cu w0.254: v1(140.58,-20.3) 141.18,-19.7 153.18,-19.7 154.966,-17.915 162.84,-17.915 v1(162.88,-17.875)
  F.Cu w0.3: IC1.51@138.443,-21.752 v1(138.443,-20.087) 138.9,-19.63 138.9,-18.313 ; R42.1@161.78,-27.175 163.23,-27.175 163.38,-27.325 R41.2@163.784,-27.325 ; R41.2@163.38,-27.175 v1(163.38,-26.52)
  B.Cu w0.254: v1(138.443,-20.087) 138.51,-20.087 138.724,-20.3 v1(140.58,-20.3)
  B.Cu w0.3: v1(162.88,-17.875) 162.88,-26.02 v1(163.38,-26.52) 163.38,-26.842
XCLKC: U1.21
XTAL: C9.1 IC1.9 Y1.1 | length 8.2
  F.Cu w0.25: Y1.1@123.788,-27.037 123.788,-26.812 125.443,-25.157 125.608,-25.157 128.128,-27.677 IC1.9@130.018,-27.677
XTAL1: C19.1 U1.35 Y2.1 | length 6.2
  F.Cu w0.25: Y2.1@161.387,-41.172 163.192,-41.172 163.367,-41.347 163.367,-39.987 162.747,-39.367 U1.35@162.747,-37.427
XTAL2: C20.1 U1.34 Y2.3 | length 12.8
  F.Cu w0.25: 156.88,-42.875 157.18,-43.175 157.18,-43.7 v1(157.68,-44.2) ; Y2.3@158.987,-43.072 158.752,-43.072 157.027,-41.347 157.027,-40.62 157.747,-39.9 161.78,-39.9 162.247,-39.433 U1.34@162.247,-37.427
pads on no net: H1.Un1 H2.Un1 H3.Un1 H4.Un1 IC1.6 IC1.7 J3.6 J3.Un1 J3.Un2 J3.Un3 U1.22 U1.39 U4.9 Y1.3 Y1.4 Y2.2 Y2.4

## Polygon pours and split planes (outlines as drawn)
GND on F.Cu "GND_L01_P000" (solid, remove dead copper, pour order 0): -5.1,4.1 -5.1,-65.1 205.2,-65.1 205.2,3.4 -5.4,3.4
GND on B.Cu "GND_L02_P001" (solid, remove dead copper, pour order 1): -5.1,4.1 -5.1,-65.1 205.2,-65.1 205.2,3.4 -5.4,3.4

## Keep-outs
Keep-Out Layer:
  the board outline again, w0.254

## Other copper
F.Cu:
  pour cut-out: 203.48,-62.4 203.48,-57.7 198.83,-57.7 198.83,-62.4
  pour cut-out: 2.2,-2.3 2.2,2.4 -2.45,2.4 -2.45,-2.3
  text "BY" at -1.6,-61.5 h3
B.Cu:
  text "BY" at 1.9,-61.5 h3

## Silkscreen, mask and mechanical layers (free items; w line width, h text height)
F.SilkS:
  circle w0.254: c193.9,-54.9 r0.5
  text "KNX_MCU_24CH_V1.2" at 186.98,0.4 h3
  text "27.07.2026" at 197.68,-1.2 h2
  text "DIO" at 149.78,-41.3 h0.7
  text "3V3" at 143.48,-41.4 h0.7
  text "RES" at 143.28,-42.6 h0.7
  text "CLK" at 149.78,-42.6 h0.7
  text "GND" at 143.38,-43.9 h0.7
  text "GND" at 142.78,-52.2 h0.7 r90
  text "DIO" at 150.38,-52.2 h0.7 r90
  text "RES" at 152.92,-52.2 h0.7 r90
  text "3V3" at 145.18,-52.3 h0.7 r90
  text "CLK" at 147.78,-52.3 h0.7 r90
B.SilkS:
  text "KNX_MCU_24CH_V1.2" at 202.92,0.4 h3
  text "27.07.2026" at 192.22,-1.2 h2
Edge.Cuts:
  circle w0.254: c185.58,-51.9 r1.75
  circle w0.254: c196.08,-4.9 r1.75
  circle w0.254: c15.58,-4.9 r1.75
  circle w0.254: c5.08,-54.9 r1.75
  circle w0.254: c185.58,-51.9 r1.5
  circle w0.254: c5.08,-54.9 r1.5
  circle w0.254: c15.58,-4.9 r1.5
  circle w0.254: c196.08,-4.9 r1.5
  lines w0.254: -2.17,-62.1 -2.17,2.3 203.33,2.3 203.33,-62.1 -2.17,-62.1

## Text inside footprints (layer, text, board x,y; h text height)
J3: Cmts.User "KEEPOUT" at 146.787,-42.847 h0.4 r90
U1: F.Fab "*" at 165.608,-36.914 h1 r180; F.Fab "*" at 165.608,-36.914 h1 r180; F.SilkS "*" at 167.056,-36.914 h1 r180; F.SilkS "*" at 167.056,-36.914 h1 r180